# EAGLE board arduino shield (EAGLE 6.5.0)
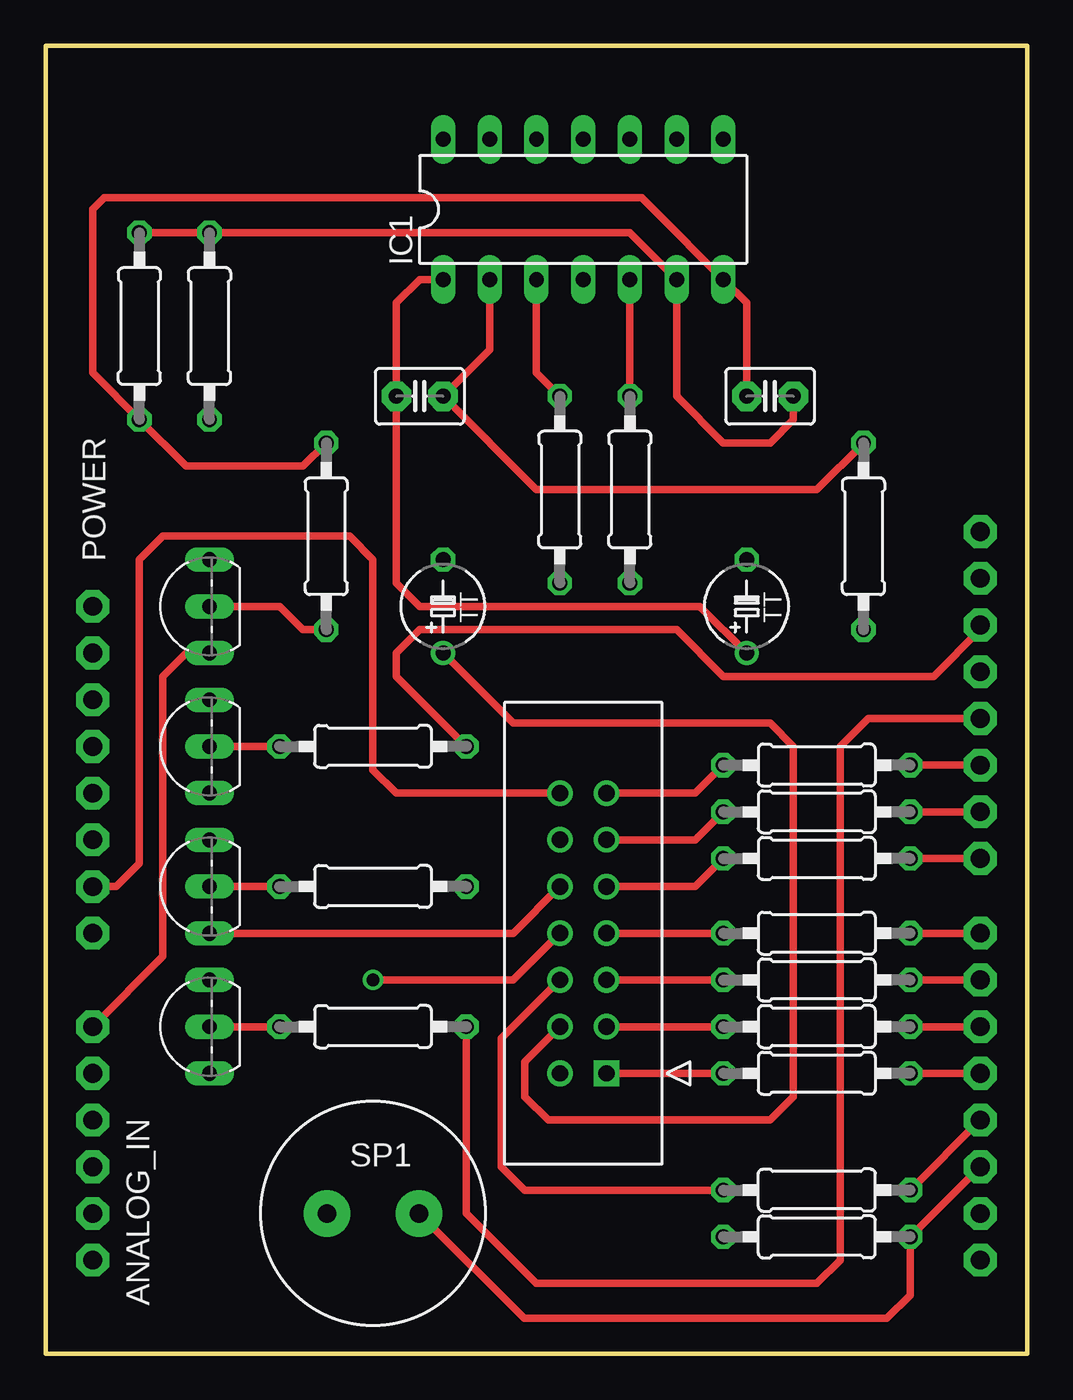
[diagram p0: board, top side]
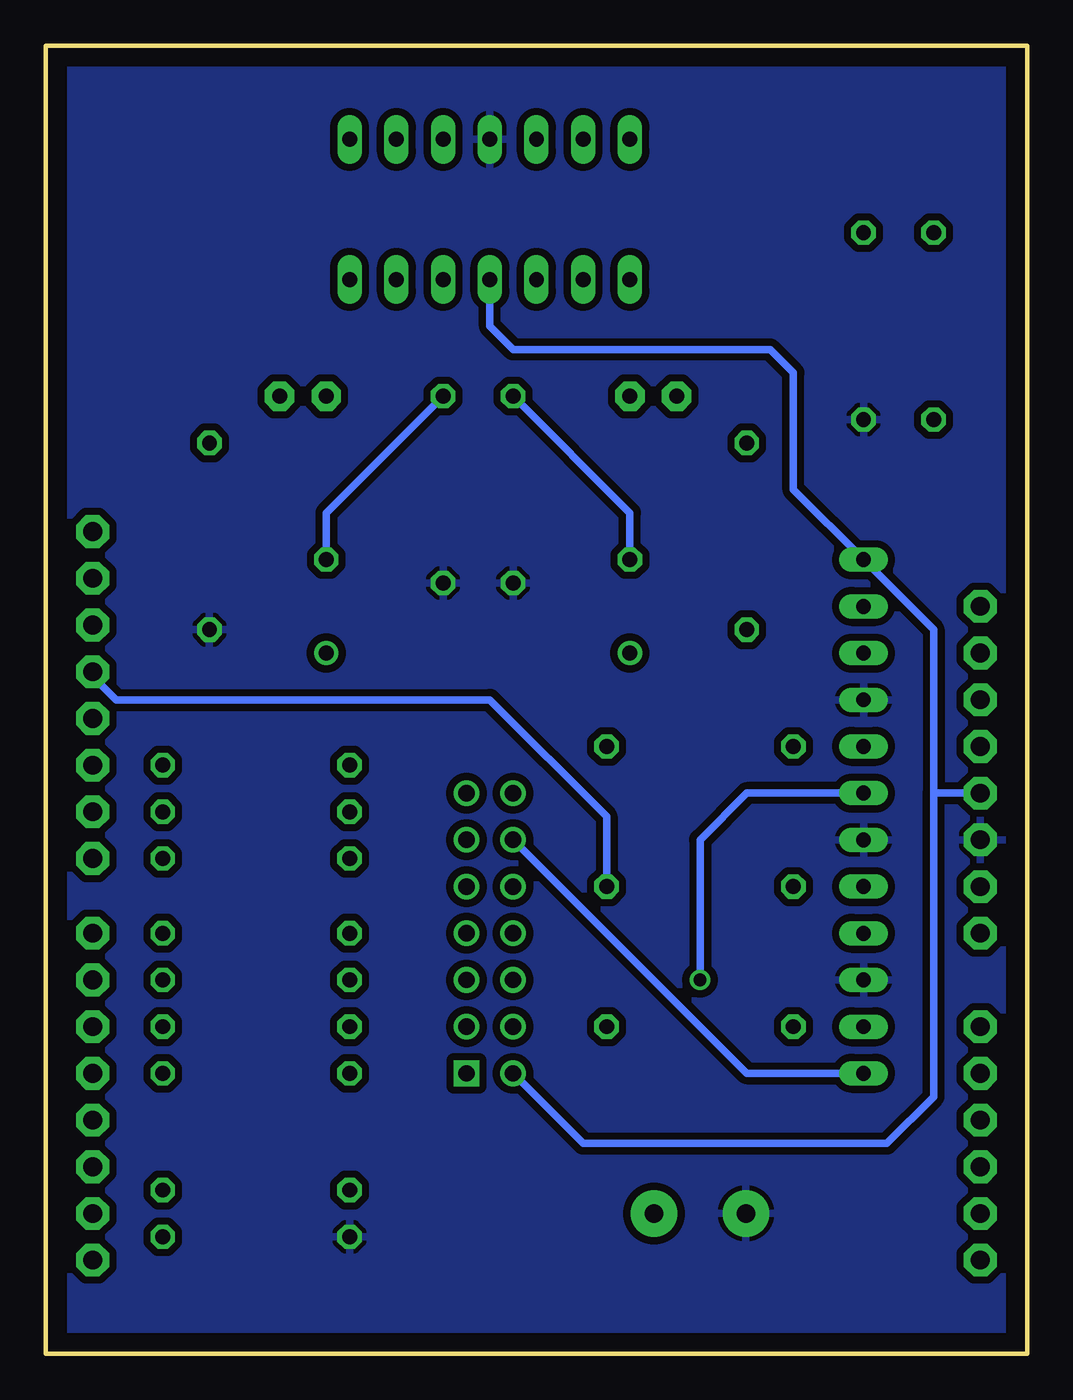
[diagram p1: board, bottom side, seen from below]

Size 53.34 x 71.12 mm. Coordinates in mm from the lower left corner, seen from the top.
Outline: 0,71.12 53.34,71.12 53.34,0 0,0 0,71.12
Copper layers (1*16): Top 0.035mm / dielectric 1.5mm / Bottom 0.035mm
Design rules "arduino shield *": minimum track width 0.4mm, minimum drill 24mil, track to track 0.4mm, track to pad 0.205mm, pad to pad 0.205mm, via to via 0.205mm, smd to smd 8mil, copper to edge 40mil, drill to drill 8mil, minimum pad ring 10mil, minimum via ring 8mil, stop-mask expansion 4mil, vias tented up to drill 0mil, thermal gap 10mil
Net classes: 0 default: clearance 0.205 mm

## Footprints (pad centres in the part's own frame; a part is rotated, then mirrored left to right if it is on the bottom)
3M_2514-6002UB = drill 0.889 square: 1 0,2.54 | drill 0.889: 2 0,0; 3 -2.54,2.54; 4 -2.54,0; 5 -5.08,2.54; 6 -5.08,0; 7 -7.62,2.54; 8 -7.62,0; 9 -10.16,2.54; 10 -10.16,0; 11 -12.7,2.54; 12 -12.7,0; 13 -15.24,2.54; 14 -15.24,0
1X06-CLEANBIG = drill 1.016 pad 1.778 octagon: 1 -6.35,0; 2 -3.81,0; 3 -1.27,0; 4 1.27,0; 5 3.81,0; 6 6.35,0
C2.5-3 = drill 0.813 pad 1.6 octagon: 1 -1.27,0; 2 1.27,0
TAP5-45 = drill 0.813: + -2.54,0 | drill 0.813 octagon: - 2.54,0
1X08-CLEANBIG = drill 1.016 pad 1.778 octagon: 1 -8.89,0; 2 -6.35,0; 3 -3.81,0; 4 -1.27,0; 5 1.27,0; 6 3.81,0; 7 6.35,0; 8 8.89,0
DIL14 = drill 0.813 long: 1 -7.62,-3.81; 2 -5.08,-3.81; 3 -2.54,-3.81; 4 0,-3.81; 5 2.54,-3.81; 6 5.08,-3.81; 7 7.62,-3.81; 8 7.62,3.81; 9 5.08,3.81; 10 2.54,3.81; 11 0,3.81; 12 -2.54,3.81; 13 -5.08,3.81; 14 -7.62,3.81
TO92-EBC = drill 0.813 long: B 0,-1.27; C -2.54,-1.27; E 2.54,-1.27
0207/10 = drill 0.813 octagon: 1 -5.08,0; 2 5.08,0
PS12 = drill 1 pad 2.54: P$1 -2.5,0; P$2 2.5,0
TO92-EBC-OVAL = drill 0.813 long: B 0,-1.27; C 2.54,-1.27; E -2.54,-1.27

## Placement (x,y rotation side)
14_PIN_HEADER  2514-6002UB  [3M_2514-6002UB]  27.94,15.24 270 top
ANALOG_IN  [1X06-CLEANBIG]  2.54,11.43 270 top
C1  0.1µF  [C2.5-3]  20.32,52.07 0 top
C2  1µF  [TAP5-45]  21.59,40.64 90 top
C3  0.1µF  [C2.5-3]  39.37,52.07 0 top
C4  1µF  [TAP5-45]  38.1,40.64 90 top
DIGITAL_IN_1  [1X08-CLEANBIG]  50.8,13.97 90 top
DIGITAL_IN_2  [1X08-CLEANBIG]  50.8,35.81 90 top
IC1  LM324N  [DIL14]  29.21,62.23 0 top
POWER  [1X08-CLEANBIG]  2.54,31.75 90 top
Q1  BC548  [TO92-EBC]  7.62,17.78 90 top
Q2  BC548  [TO92-EBC]  7.62,25.4 90 top
Q3  BC548  [TO92-EBC]  7.62,33.02 90 top
R1  430  [0207/10]  41.91,15.24 180 top
R2  430  [0207/10]  41.91,17.78 180 top
R3  430  [0207/10]  41.91,20.32 180 top
R4  430  [0207/10]  41.91,22.86 180 top
R5  430  [0207/10]  41.91,26.92 180 top
R6  430  [0207/10]  41.91,29.46 180 top
R7  430  [0207/10]  41.91,32 180 top
R8  220  [0207/10]  41.91,8.89 0 top
R9  10k  [0207/10]  17.78,17.78 180 top
R10  10k  [0207/10]  17.78,25.4 180 top
R11  10k  [0207/10]  17.78,33.02 180 top
R13  1k  [0207/10]  41.91,6.35 0 top
R14  68K  [0207/10]  27.94,46.99 90 top
R15  8.2K  [0207/10]  44.45,44.45 90 top
R16  470K  [0207/10]  5.08,55.88 90 top
R17  68K  [0207/10]  31.75,46.99 90 top
R18  1K  [0207/10]  8.89,55.88 90 top
R19  1.8K  [0207/10]  15.24,44.45 90 top
SP1  SPEAKER/PS12  [PS12]  17.78,7.62 0 top
T1  2N2222  [TO92-EBC-OVAL]  7.62,40.64 90 top

## Library data of the parts
14_PIN_HEADER = 3M_By_element14_Batch_1; MPN: 2514-6002UB; OC_FARNELL: 1368928; OC_NEWARK: 46F4726; PACKAGE: Four-Wall Header, 14way; SUPPLIER: 3M
ANALOG_IN DIGITAL_IN_1 DIGITAL_IN_2 POWER SP1 T1 = adafruit
C1 C3 = capacitor-wima
C2 C4 = rcl
IC1 = linear
Q1-Q3 = transistor-npn
R1-R11 R13-R19 = resistor

## Nets
+5V: 14_PIN_HEADER.2 IC1.4 POWER.4 T1.C
A0: ANALOG_IN.1 T1.E
DIG_1: 14_PIN_HEADER.12 Q1.C
DIG_1_CTRL: DIGITAL_IN_2.4 R9.1
DIG_2: 14_PIN_HEADER.10 Q2.C
DIG_2_CTRL: DIGITAL_IN_2.5 R10.1
DIG_3: 14_PIN_HEADER.8 Q3.C
DIG_3_CTRL: DIGITAL_IN_2.6 R11.1
GND: IC1.11 POWER.3 Q1.E Q2.E Q3.E R13.1 R14.1 R15.1 R17.1 R18.1 SP1.P$1
IR_GND: 14_PIN_HEADER.14 POWER.2
IR_SIGNAL: 14_PIN_HEADER.4 C2.+
N$1: 14_PIN_HEADER.6 R8.1
N$9: Q1.B R9.2
N$10: Q2.B R10.2
N$11: Q3.B R11.2
N$14: 14_PIN_HEADER.1 R1.2
N$15: 14_PIN_HEADER.3 R2.2
N$16: 14_PIN_HEADER.5 R3.2
N$17: 14_PIN_HEADER.7 R4.2
N$18: 14_PIN_HEADER.9 R5.2
N$19: 14_PIN_HEADER.11 R6.2
N$20: 14_PIN_HEADER.13 R7.2
N$28: C2.- IC1.3 R14.2
N$30: C1.2 IC1.2 R15.2
N$31: C1.1 C4.+ IC1.1
N$32: R19.1 T1.B
N$33: C4.- IC1.5 R17.2
N$34: C3.2 IC1.6 R16.2 R18.2
N$35: C3.1 IC1.7 R16.1 R19.2
PIEZO: DIGITAL_IN_1.3 R13.2 SP1.P$2
PULSE_LED: DIGITAL_IN_1.4 R8.2
SEG_A: DIGITAL_IN_1.5 R1.1
SEG_B: DIGITAL_IN_1.6 R2.1
SEG_C: DIGITAL_IN_1.7 R3.1
SEG_D: DIGITAL_IN_1.8 R4.1
SEG_E: DIGITAL_IN_2.1 R5.1
SEG_F: DIGITAL_IN_2.2 R6.1
SEG_G: DIGITAL_IN_2.3 R7.1

## Tracks (layer width: path | path; a pad name or v marks a point on that pad's centre or on a via)
+5V
  Bottom 0.406: IC1.4 29.21,55.88 27.94,54.61 13.97,54.61 12.7,53.34 12.7,46.99 T1.C 5.08,39.37 5.08,30.48 | 5.08,30.48 POWER.4 | 14_PIN_HEADER.2 24.13,11.43 7.62,11.43 5.08,13.97 5.08,30.48
A0
  Top 0.406: ANALOG_IN.1 6.35,21.59 6.35,36.83 7.62,38.1 T1.E
DIG_1
  Bottom 0.4: Q1.C 15.24,15.24 14_PIN_HEADER.12
DIG_1_CTRL
  Top 0.406: DIGITAL_IN_2.4 44.7,34.54 43.18,33.02 43.18,5.08 41.91,3.81 26.67,3.81 22.86,7.62 R9.1
DIG_2
  Top 0.4: Q2.C 25.4,22.86 14_PIN_HEADER.10
DIG_2_CTRL
  Bottom 0.4: R10.1 22.86,29.21 29.21,35.56 49.53,35.56 50.8,36.83 DIGITAL_IN_2.5
DIG_3  (via drill 0.7)
  Top 0.406: v17.78,20.32 25.4,20.32 14_PIN_HEADER.8
  Bottom 0.406: Q3.C 15.24,30.48 17.78,27.94 v17.78,20.32
DIG_3_CTRL
  Top 0.4: 20.32,35.56 R11.1 | 20.32,39.37 34.29,39.37 36.83,36.83 48.26,36.83 50.8,39.37 DIGITAL_IN_2.6
  Top 0.406: 20.32,39.37 19.05,38.1 19.05,36.83 20.32,35.56
GND
  pour Bottom: 0,71.12 53.34,71.12 53.34,0 0,0
IR_GND
  Top 0.406: 14_PIN_HEADER.14 19.05,30.48 17.78,31.75 17.78,43.18 16.51,44.45 6.35,44.45 5.08,43.18 5.08,26.67 3.81,25.4 POWER.2
IR_SIGNAL
  Top 0.406: C2.+ 25.4,34.29 39.37,34.29 40.64,33.02 40.64,13.97 39.37,12.7 27.3,12.7 26.04,13.97 26.04,15.88 14_PIN_HEADER.4
N$1
  Top 0.406: R8.1 26.04,8.89 24.77,10.16 24.77,17.14 14_PIN_HEADER.6
N$9
  Top 0.4: R9.2 Q1.B
N$10
  Top 0.4: R10.2 Q2.B
N$11
  Top 0.4: R11.2 Q3.B
N$14
  Top 0.406: R1.2 14_PIN_HEADER.1
N$15
  Top 0.406: R2.2 14_PIN_HEADER.3
N$16
  Top 0.406: R3.2 14_PIN_HEADER.5
N$17
  Top 0.406: R4.2 14_PIN_HEADER.7
N$18
  Top 0.406: 14_PIN_HEADER.9 35.31,25.4 R5.2
N$19
  Top 0.406: 14_PIN_HEADER.11 35.31,27.94 R6.2
N$20
  Top 0.406: 14_PIN_HEADER.13 35.31,30.48 R7.2
N$28
  Top 0.406: R14.2 26.67,53.34 IC1.3
  Bottom 0.406: C2.- 21.59,45.72 R14.2
N$30
  Top 0.406: R15.2 41.91,46.99 26.67,46.99 C1.2 24.13,54.61 IC1.2
N$31
  Top 0.4: C4.+ 35.56,40.64 20.32,40.64 19.05,41.91 C1.1
  Top 0.406: IC1.1 20.32,58.42 19.05,57.15 C1.1
N$32
  Top 0.406: T1.B 12.7,40.64 13.97,39.37 R19.1
N$33
  Top 0.4: R17.2 IC1.5
  Bottom 0.406: R17.2 38.1,45.72 C4.-
N$34
  Top 0.4: IC1.6 31.75,60.96 R18.2
  Top 0.406: R16.2 R18.2 | IC1.6 34.29,52.07 36.83,49.53 39.37,49.53 40.64,50.8 C3.2
N$35
  Top 0.4: 33.02,62.23 IC1.7
  Top 0.406: R19.2 13.97,48.26 7.62,48.26 R16.1 2.54,53.34 2.54,62.23 3.18,62.87 32.38,62.87 33.02,62.23 | IC1.7 38.1,57.15 C3.1
PIEZO
  Top 0.406: DIGITAL_IN_1.3 R13.2 46.99,3.17 45.72,1.91 26,1.91 SP1.P$2
PULSE_LED
  Top 0.406: DIGITAL_IN_1.4 R8.2
SEG_A
  Top 0.406: R1.1 DIGITAL_IN_1.5
SEG_B
  Top 0.406: R2.1 DIGITAL_IN_1.6
SEG_C
  Top 0.406: R3.1 DIGITAL_IN_1.7
SEG_D
  Top 0.406: R4.1 DIGITAL_IN_1.8
SEG_E
  Top 0.406: R5.1 DIGITAL_IN_2.1
SEG_F
  Top 0.406: R6.1 DIGITAL_IN_2.2
SEG_G
  Top 0.406: R7.1 DIGITAL_IN_2.3